# EAGLE board RH006.1 (EAGLE 7.1.0)
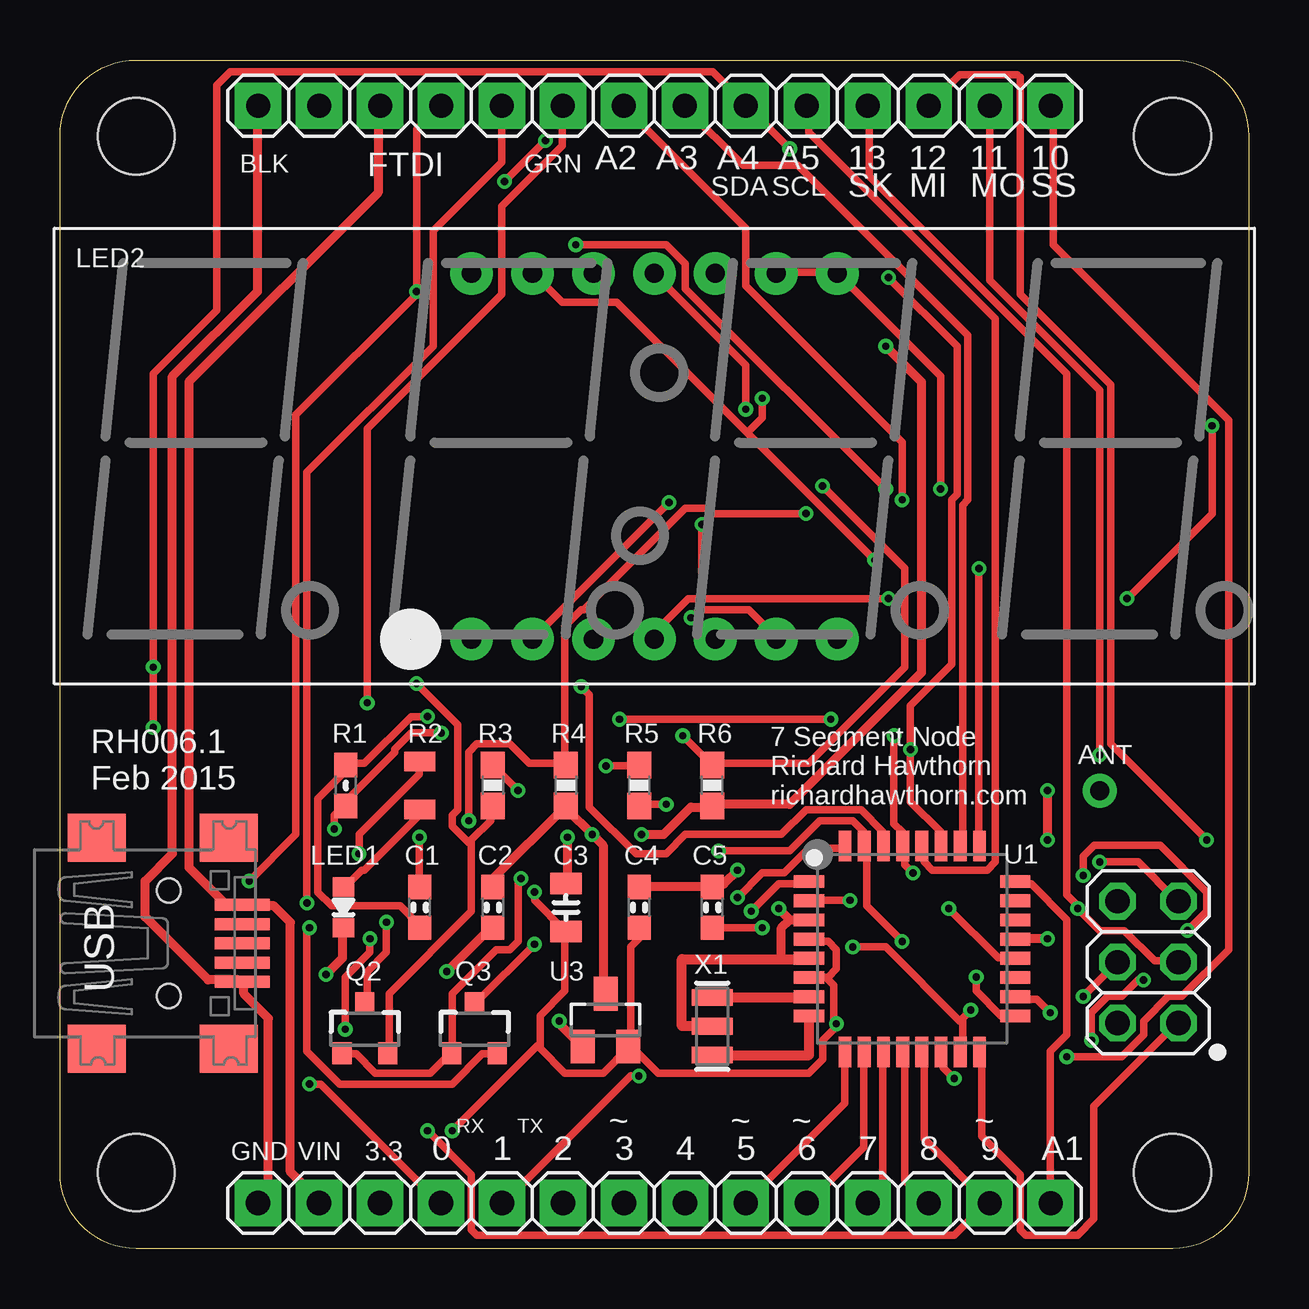
[diagram p0: board, top side]
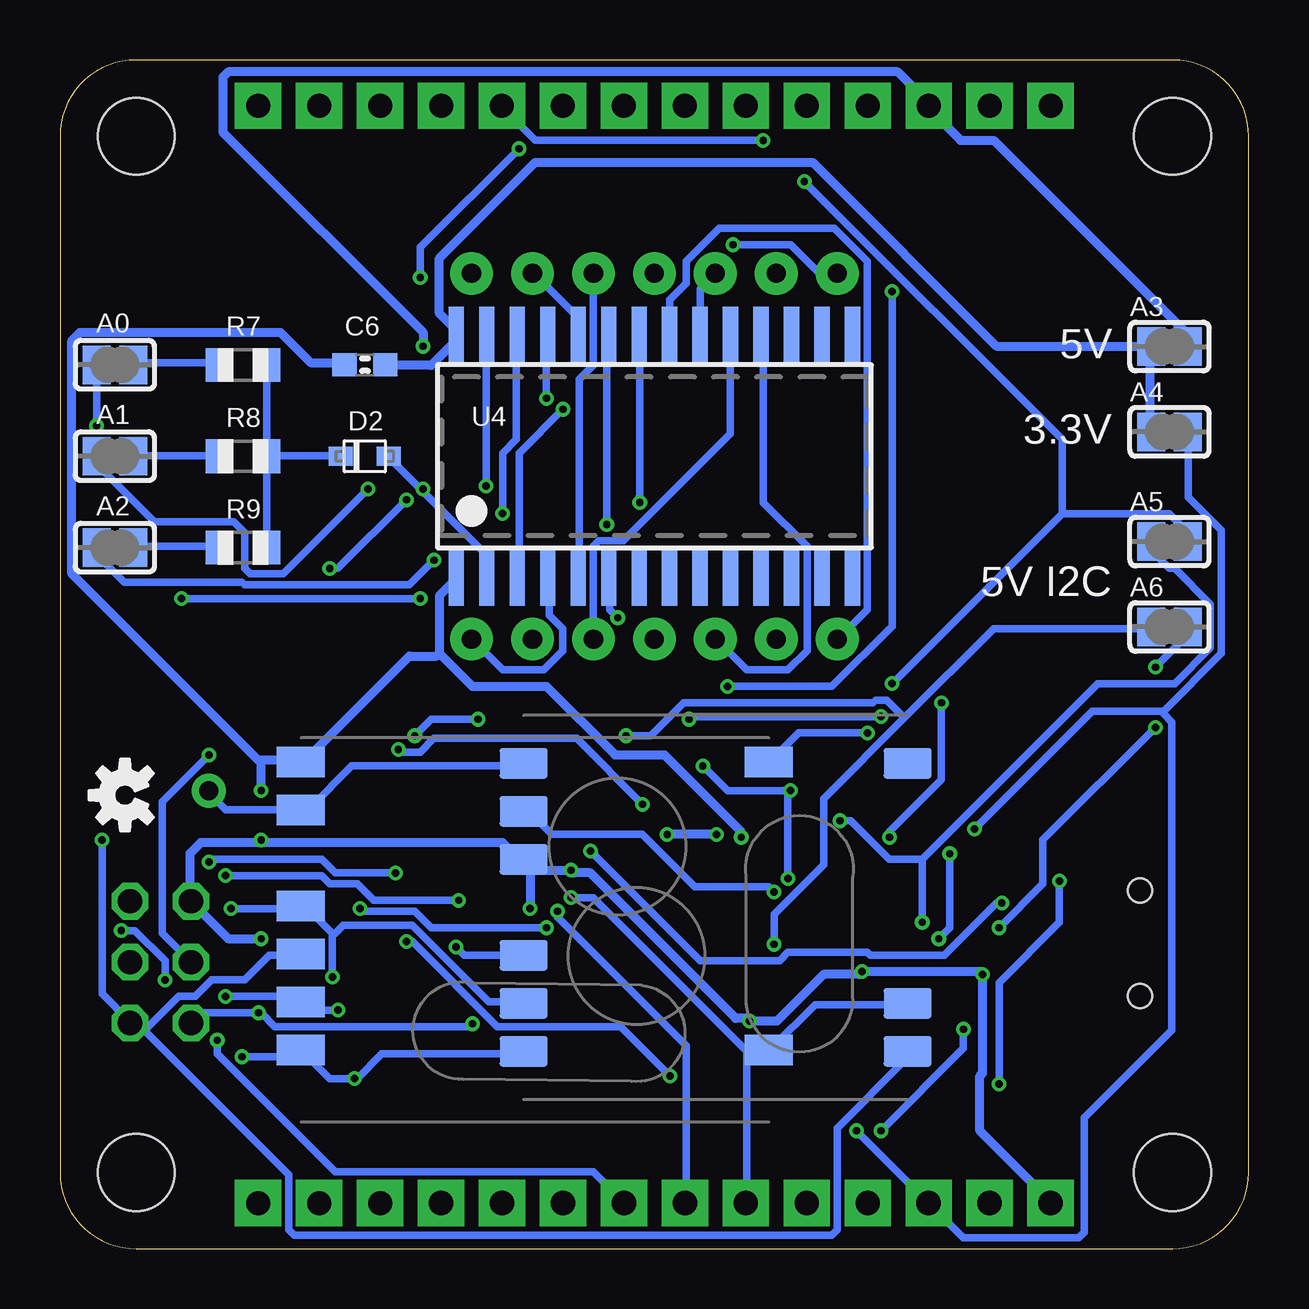
[diagram p1: board, bottom side, seen from below]

Size 49.53 x 49.53 mm. Coordinates in mm from the lower left corner, seen from the top.
Outline: 0,3.17 0,46.35 arc-90 3.17,49.53 46.35,49.53 arc-90 49.53,46.35 49.53,3.17 arc-90 46.35,0 3.17,0 arc-90 0,3.17
Copper layers (1*16): Top 0.035mm / dielectric 1.5mm / Bottom 0.035mm
Design rules "ITEADstudio_DRC *": minimum track width 12mil, minimum drill 12mil, track to track 6mil, track to pad 6mil, pad to pad 6mil, via to via 6mil, smd to smd 0mil, copper to edge 10mil, drill to drill 10mil, minimum pad ring 10mil, minimum via ring 6mil, stop-mask expansion 2mil, vias tented up to drill 100mil, thermal gap 15mil
Net classes: 1 power: width 0.381 mm, clearance 0.254 mm
Holes 3.2 mm at 3.17,3.17 46.35,3.17 3.17,46.35 46.35,46.35
tKeepout: area 0,0 to 5.7,5.7; area 43.8,0 to 49.5,5.7; area 43.8,43.8 to 49.5,49.5; area 0,43.8 to 5.7,49.5
bKeepout: area 0,43.8 to 5.7,49.5; area 43.8,43.8 to 49.5,49.5; area 43.8,0 to 49.5,5.7; area 0,0 to 5.7,5.7
tRestrict: area 24.3,8.9 to 29.1,12.8; area 5.8,16.9 to 6.9,18.5; area 5.2,9.7 to 6.7,10.4
bRestrict: area 27.4,17.7 to 29.2,18.7; area 21.1,13.8 to 22.9,14.9; area 21.6,12.6 to 22.1,13.2; area 20.7,12.6 to 21.2,13.2; area 20.2,12.8 to 20.7,13.5; area 20.1,13.4 to 20.6,14; area 26.5,18.9 to 27.1,19.5; area 26.5,17.9 to 27.1,18.5; area 27.5,19.1 to 28,19.8; area 27.9,18.8 to 29.1,19.6

## Footprints (pad centres in the part's own frame; a part is rotated, then mirrored left to right if it is on the bottom)
SOLDERJUMPER_REFLOW_NOPASTE = smd 1.168 x 1.6: 1 -0.762,0; 2 0.762,0
0603-CAP = smd 1.016 x 0.965: 1 -0.85,0; 2 0.85,0
0805-CAP = smd 0.902 x 1.3: 1 -1,0; 2 1,0
USB-MINIB = smd 0.5 x 2.308: D+ 0,4.064; D- -0.8,4.064; GND 1.6,4.064; ID 0.8,4.064; VBUS -1.6,4.064 | smd 2 x 2.4: GND1 -4.4,-2; GND2 -4.4,3.5; GND3 4.4,3.5; GND4 4.4,-2 | hole 1: -2.2,1; 2.2,1
1X06 = drill 1 pad 1.93 square: 1 -6.35,0; 2 -3.81,0; 3 -1.27,0; 4 1.27,0; 5 3.81,0; 6 6.35,0
SOD-323F = smd 1 x 0.8: A -1,0; C 1,0
2X03 = drill 1.016 octagon: 1 -2.54,-1.27; 2 -2.54,1.27; 3 0,-1.27; 4 0,1.27; 5 2.54,-1.27; 6 2.54,1.27
1X14 = drill 1 pad 1.93 square: 1 -16.51,0; 2 -13.97,0; 3 -11.43,0 | drill 1.016 pad 1.93 square: 4 -8.89,0; 5 -6.35,0; 6 -3.81,0; 7 -1.27,0; 8 1.27,0; 9 3.81,0; 10 6.35,0; 11 8.89,0; 12 11.43,0; 13 13.97,0; 14 16.51,0
1X08 = drill 1 pad 1.93 square: 1 -8.89,0; 2 -6.35,0; 3 -3.81,0; 4 -1.27,0; 5 1.27,0; 6 3.81,0; 7 6.35,0; 8 8.89,0
0603-LED = smd 0.8 x 0.9: MINUS -0.85,0; PLUS 0.85,0
SEGMENT-BL-Q56C43 = drill 0.8 pad 1.778: P$1 -7.62,-7.62; P$2 -5.08,-7.62; P$3 -2.54,-7.62; P$4 0,-7.62; P$5 2.54,-7.62; P$6 5.08,-7.62; P$7 7.62,-7.62; P$8 7.62,7.62; P$9 5.08,7.62; P$10 2.54,7.62; P$11 0,7.62; P$12 -2.54,7.62; P$13 -5.08,7.62; P$14 -7.62,7.62
SOT23-3 = smd 0.8 x 0.9: 1 -0.95,-1; 2 0.95,-1; 3 0,1.1
0603-RES = smd 1.016 x 0.965: 1 -0.85,0; 2 0.85,0
0805 = smd 0.8 x 1.3: 1 -1,0; 2 1,0
0603-RES' = smd 1.1 x 1: 1 -0.85,0; 2 0.85,0
R0805 = smd 1.1 x 1.4: 1 -1,0; 2 1,0
RFM12B-MINPADS = smd 2 x 1.27: ANT 8,-6; GND 8,-2; IRQ -8,4; SCK 8,4; SDI 8,2; SDI1 -8.002,-6.001; SDO -8,6; SEL 8,6; VDD 8,-4
RFM69W-MINPADS = smd 2 x 1.27: ANA 8,-5; DIO0 -11.5,5; GND 8,-7; MISO 8,1; MOSI 8,3; NSS 8,5; SCK 8,-1; VDD -11.5,-7
TQFP32-08 = smd 1.27 x 0.533: 1 -4.293,2.8; 2 -4.293,2; 3 -4.293,1.2; 4 -4.293,0.4; 5 -4.293,-0.4; 6 -4.293,-1.2; 7 -4.293,-2; 8 -4.293,-2.8; 17 4.293,-2.8; 18 4.293,-2; 19 4.293,-1.2; 20 4.293,-0.4; 21 4.293,0.4; 22 4.293,1.2; 23 4.293,2; 24 4.293,2.8 | smd 0.533 x 1.27: 9 -2.8,-4.293; 10 -2,-4.293; 11 -1.2,-4.293; 12 -0.4,-4.293; 13 0.4,-4.293; 14 1.2,-4.293; 15 2,-4.293; 16 2.8,-4.293; 25 2.8,4.293; 26 2,4.293; 27 1.2,4.293; 28 0.4,4.293; 29 -0.4,4.293; 30 -1.2,4.293; 31 -2,4.293; 32 -2.8,4.293
SOT23 = smd 1 x 1.4: 1 -0.95,-1.1; 2 0.95,-1.1; 3 0,1.1
SOP28_300MIL = smd 0.635 x 2.286: P$1 -8.255,-5.08; P$2 -6.985,-5.08; P$3 -5.715,-5.08; P$4 -4.445,-5.08; P$5 -3.175,-5.08; P$6 -1.905,-5.08; P$7 -0.635,-5.08; P$8 0.635,-5.08; P$9 1.905,-5.08; P$10 3.175,-5.08; P$11 4.445,-5.08; P$12 5.715,-5.08; P$13 6.985,-5.08; P$14 8.255,-5.08; P$15 8.255,5.08; P$16 6.985,5.08; P$17 5.715,5.08; P$18 4.445,5.08; P$19 3.175,5.08; P$20 1.905,5.08; P$21 0.635,5.08; P$22 -0.635,5.08; P$23 -1.905,5.08; P$24 -3.175,5.08; P$25 -4.445,5.08; P$26 -5.715,5.08; P$27 -6.985,5.08; P$28 -8.255,5.08
RFM12B-ANTENNA = drill 0.8 pad 1.422: P$1 0,0
RESONATOR-SMD = smd 0.7 x 1.7: 1 -1.2,0; 2 0,0; 3 1.2,0

## Placement (x,y rotation side)
A0  [SOLDERJUMPER_REFLOW_NOPASTE]  47.24,36.83 180 bottom
A1  [SOLDERJUMPER_REFLOW_NOPASTE]  47.24,33.02 180 bottom
A2  [SOLDERJUMPER_REFLOW_NOPASTE]  47.24,29.21 180 bottom
A3  5V  [SOLDERJUMPER_REFLOW_NOPASTE]  3.3,37.59 0 bottom
A4  3.3V  [SOLDERJUMPER_REFLOW_NOPASTE]  3.3,34.04 0 bottom
A5  SCL  [SOLDERJUMPER_REFLOW_NOPASTE]  3.3,29.46 0 bottom
A6  SDA  [SOLDERJUMPER_REFLOW_NOPASTE]  3.3,25.91 0 bottom
C1  0.1  [0603-CAP]  14.99,14.22 90 top
C2  1u  [0603-CAP]  18.03,14.22 270 top
C3  10u  [0805-CAP]  21.08,14.22 90 top
C4  0.1  [0603-CAP]  24.13,14.22 90 top
C5  0.1  [0603-CAP]  27.18,14.22 90 top
C6  0.1  [0603-CAP]  36.83,36.83 180 bottom
CN1  USB  [USB-MINIB]  3.53,12.73 270 top
CN4  FTDI  [1X06]  14.61,47.62 0 top
D2  1N4148  [SOD-323F]  36.83,33.02 180 bottom
ICSP1  ICSP  [2X03]  45.34,11.94 90 top
JP3  [1X14]  24.77,1.91 180 top
JP5  [1X08]  32.38,47.62 0 top
LED1  LED0603  [0603-LED]  11.81,14.22 90 top
LED2  [SEGMENT-BL-Q56C43]  24.77,33.02 0 top
Q2  BSS138  [SOT23-3]  12.7,9.14 0 top
Q3  BSS138  [SOT23-3]  17.27,9.14 0 top
R1  10k  [0603-RES]  11.91,19.3 90 top
R2  1k5  [0805]  14.99,19.3 90 top
R3  10K  [0603-RES']  18.03,19.3 270 top
R4  10K  [0603-RES']  21.08,19.3 90 top
R5  10K  [0603-RES']  24.13,19.3 270 top
R6  10K  [0603-RES']  27.18,19.3 90 top
R7  47K  [R0805]  41.91,36.83 180 bottom
R8  47K  [R0805]  41.91,33.02 180 bottom
R9  47K  [R0805]  41.91,29.21 180 bottom
RF1  RFM12B  [RFM12B-MINPADS]  22.21,14.22 180 bottom
RF2  RFM69  [RFM69W-MINPADS]  31.5,13.28 180 bottom
U1  ATMega-328  [TQFP32-08]  35.51,12.5 0 top
U3  MCP1703CB  [SOT23]  22.73,9.53 0 top
U4  [SOP28_300MIL]  24.77,33.02 0 bottom
U$1  RFM12B_ANTENNA  [RFM12B-ANTENNA]  43.33,19.08 0 top
U$3  [OSHW-LOGO-S]  46.82,18.9 90 bottom
X1  16 MHz  [RESONATOR-SMD]  27.18,9.27 270 top

## Library data of the parts
A0 A1-A6 LED2 U4 = microbuilder
C1-C6 CN1 LED1 R1 R2 RF1 RF2 U1 U$1 = LowPowerLab
CN4 ICSP1 JP3 JP5 = pinhead
D2 R7-R9 = adafruit
Q2 Q3 R3-R6 X1 = SparkFun
U3 = linear
U$3 = SparkFun-Aesthetics

## Nets
3.3V: A4.2 C3.1 C4.1 ICSP1.2 JP3.12 R1.1 RF1.VDD RF2.VDD U1.4 U1.6 U1.18 U3.2
A0: U1.23
A1: JP3.1 U1.24
A2: JP5.1 U1.25
A3: JP5.2 U1.26
A4_SDA: A6.2 JP5.3 Q3.2 R5.2 U1.27
A5_SCL: A5.2 JP5.4 Q2.2 R3.2 U1.28
A6: U1.19
A7: U1.22
ADD0: A0.2 LED2.P$4 U4.P$23
ADD1: A1.2 LED2.P$8 LED2.P$9 U4.P$24
ADD2: A2.2 LED2.P$13 U4.P$25
AREF: C5.1 U1.20
COM: D2.A LED2.P$14 U4.P$2
D0_RX: CN4.4 JP3.11 U1.30
D1_TX: CN4.5 JP3.10 U1.31
D2: JP3.9 RF1.IRQ RF2.DIO0 U1.32
D3: JP3.8 U1.1
D4: JP3.7 U1.2
D5: JP3.6 U1.9
D6: JP3.5 U1.10
D7: JP3.4 U1.11
D8: JP3.3 U1.12
D9: JP3.2 R2.2 U1.13
D10_SS: JP5.8 RF1.SEL RF2.NSS U1.14
D11_MOSI: ICSP1.4 JP5.7 RF1.SDI RF2.MOSI U1.15
D12_MISO: ICSP1.1 JP5.6 RF1.SDO RF2.MISO U1.16
D13_SCK: ICSP1.3 JP5.5 RF1.SCK RF2.SCK U1.17
GND [power]: C2.2 C3.2 C4.2 C5.2 C6.2 CN1.GND CN4.1 ICSP1.6 JP3.14 LED1.MINUS RF1.GND RF2.GND U1.3 U1.5 U1.21 U3.1 U4.P$1 X1.2
N$1: U1.7 X1.1
N$2: LED1.PLUS R2.1
N$3: RF1.ANT RF2.ANA U$1.P$1
N$5: A0.1 R7.2
N$7: LED2.P$11 U4.P$3
N$8: LED2.P$7 U4.P$4
N$9: LED2.P$10 U4.P$5
N$10: LED2.P$6 U4.P$6
N$11: LED2.P$2 U4.P$22
N$12: LED2.P$1 U4.P$21
N$13: LED2.P$12 U4.P$20
N$15: LED2.P$5 U4.P$19
N$16: LED2.P$3 U4.P$18
N$17: D2.C R7.1 R8.1 R9.1
N$18: A2.1 R9.2
N$19: A1.1 R8.2
N$20: C1.2 CN4.6
N$21: U1.8 X1.3
RST: C1.1 ICSP1.5 R1.2 U1.29
SCL: A5.1 Q2.3 R4.2 U4.P$26
SDA: A6.1 Q3.3 R6.2 U4.P$27
VBUS [power]: A3.2 C2.1 CN1.VBUS CN4.3 JP3.13 R4.1 R6.1 U3.3
VCC: Q2.1 Q3.1 R3.1 R5.1
VLED [power]: A3.1 A4.1 C6.1 U4.P$28

## Tracks (layer width: path | path; a pad name or v marks a point on that pad's centre or on a via)
3.3V  (via drill 0.3)
  Top 0.305: v15.89,21.49 14.63,21.49 13.95,20.8 13.95,20.69 12,18.75 12,18.52 R1.1 11.77,18.4 11.43,18.06 v11.43,17.49 | v41.26,9.83 40.69,10.4 39.89,10.4 U1.18 | 32,11.32 31.32,11.32 U1.6 | 32,11.32 32.35,11.66 32.35,12.46 32,12.8 31.32,12.8 U1.4 | C4.1 24.12,13.37 24.12,12.92 23.77,12.57 23.77,8.46 U3.2 | 20,8.46 20,8.34 21.03,7.32 22.63,7.32 23.66,8.34 U3.2 | 20,8.46 20,9.72 21.03,10.74 21.03,13.14 C3.1 21.03,13.26 19.77,14.52 v19.77,14.86 | 32.23,9.37 32.23,9.14 31.77,8.69 31.77,7.89 31.2,7.32 24.92,7.32 23.89,8.34 U3.2 | 32.23,9.37 32.23,10.97 32,11.2 32,11.32 | v16.34,4.92 19.89,8.46 20,8.46 | v32.35,9.37 32.23,9.37
  Bottom 0.305: v15.89,21.49 18.75,21.49 19.89,20.34 RF2.VDD 20,20.34 | 3.54,22.4 1.14,24.8 1.14,29.95 2.52,31.32 2.52,33.95 A4.2 | 3.54,22.4 6.51,22.4 v11.43,17.49 | ICSP1.2 44.01,9.49 43.66,9.83 v41.26,9.83 41.15,9.83 40.58,9.26 32.46,9.26 v32.35,9.37 | v19.77,14.86 20,15.09 23.09,15.09 25.26,17.26 29.03,17.26 29.95,18.17 30.18,18.17 RF1.VDD | v16.34,4.92 JP3.12 11.89,0.46 7.09,0.46 6.86,0.69 6.86,5.45 3.2,9.11 3.2,21.95 3.54,22.29 3.54,22.4
A1
  Top 0.305: U1.24 39.89,15.2 40.46,15.2 41.95,13.72 41.95,8.91 41.26,8.23 41.26,1.94 JP3.1
A2  (via drill 0.3)
  Top 0.305: v38.29,28.35 38.29,16.8 U1.25 | v35.09,31.2 35.09,33.6 28.57,40.12 28.57,42.52 23.55,47.55 JP5.1
  Bottom 0.305: v38.29,28.35 37.95,28.35 v35.09,31.2
A3
  Top 0.305: U1.26 37.6,16.8 37.6,30.98 37.83,31.2 37.83,38.06 30.75,45.15 28.46,45.15 26.06,47.55 JP5.2
A4_SDA  (via drill 0.3)
  Top 0.305: v25.26,18.52 24.23,18.52 R5.2 | U1.27 36.69,16.8 36.69,17.37 35.43,18.63 v35.43,20.8 35.43,22.63 37.15,24.35 37.15,31.2 37.38,31.43 37.38,37.6 v34.52,40.46 | v10.4,13.37 10.29,13.26 10.29,8.23 11.66,6.86 16.34,6.86 17.6,8.12 18.17,8.12 Q3.2 | v3.89,21.72 v3.89,24.23 3.89,36.46 6.53,39.1 6.53,48.48 7.09,49.03 27.2,49.03 28.57,47.66 JP5.3 28.69,47.55 v30.4,45.83
  Bottom 0.305: v25.26,18.52 28,21.26 33.95,21.26 34.52,20.69 35.32,20.69 v35.43,20.8 | v10.4,13.37 8.57,15.2 8.57,17.03 v3.89,21.72 | v3.89,24.23 2.63,25.49 2.63,25.83 A6.2 | v34.52,40.46 34.52,41.72 v30.4,45.83
A5_SCL  (via drill 0.3)
  Top 0.305: 17.14,16.92 17.14,17.03 17.95,17.83 17.95,18.4 R3.2 | 17.14,16.92 17.14,14.06 13.72,10.63 13.72,8.23 Q2.2 | v14.86,23.55 16.57,21.83 16.57,18.29 16.34,18.06 16.34,17.6 17.03,16.92 17.14,16.92 | U1.28 36.01,16.69 36.01,16.12 36.35,15.77 38.63,15.77 38.98,16.12 38.98,38.75 31.2,46.52 31.2,47.55 JP5.4 | v20.23,46.18 v18.52,44.46
  Bottom 0.305: 7.77,30.63 3.31,30.63 2.63,29.95 2.63,29.49 A5.2 | v14.86,23.55 7.77,30.63 | 7.77,30.63 7.77,33.72 v18.52,44.46 | v20.23,46.18 29.72,46.18 31.09,47.55 JP5.4
ADD0  (via drill 0.3)
  Top 0.305: v48.01,34.29 48.01,30.63 v44.46,27.09 | 26.75,27.09 26.18,27.09 24.8,25.72 24.8,25.49 LED2.P$4 | 26.75,27.09 v34.52,27.09 | 26.75,27.09 v26.75,30.18
  Bottom 0.305: v48.01,34.29 A0.2 | v34.52,27.09 v44.46,27.09 | v26.75,30.18 26.75,38.06 U4.P$23
ADD1  (via drill 0.3)
  Top 0.305: v36.69,31.66 36.69,36.35 32.46,40.58 LED2.P$8 32.23,40.69 29.95,40.69 LED2.P$9
  Bottom 0.305: U4.P$24 28,38.18 28,38.86 29.83,40.69 LED2.P$9 | A1.2 48.01,32.69 45.61,30.29 42.29,30.29 41.83,29.83 41.83,28.35 41.6,28.12 40.23,28.12 v36.69,31.66
ADD2  (via drill 0.3)
  Top 0.305: 28.63,34 23.2,39.43 20.92,39.43 19.77,40.58 LED2.P$13 | 28.63,34 v33.95,28.69 | v29.26,35.43 29.26,34.63 28.63,34
  Bottom 0.305: A2.2 48.01,28.92 46.86,27.77 41.95,27.77 41.83,27.66 34.98,27.66 v33.95,28.69 | v29.26,35.43 29.26,38.06 U4.P$25
AREF  (via drill 0.3)
  Top 0.305: v29.26,13.37 27.2,13.37 C5.1 | v37.03,14.17 39.09,12.12 39.78,12.12 U1.20
  Bottom 0.305: v29.26,13.37 34.06,13.37 34.75,14.06 36.92,14.06 v37.03,14.17
COM  (via drill 0.3)
  Top 0.305: v21.49,41.83 25.26,41.83 26.06,41.03 26.06,40.01 v34.4,31.66
  Bottom 0.305: 34.46,31.6 31.77,28.92 31.77,28 U4.P$2 | 34.46,31.6 35.78,32.92 D2.A | v21.49,41.83 19.09,41.83 17.95,40.69 17.14,40.69 LED2.P$14 | v34.4,31.66 34.46,31.6
D0_RX  (via drill 0.3)
  Top 0.305: v21.72,23.43 22.06,23.09 22.06,18.4 24,16.46 25.26,16.46 26.06,17.26 30.06,17.26 31.09,18.29 33.38,18.29 34.29,17.37 34.29,16.8 U1.30 | CN4.4 15.77,47.55 14.86,46.63 v14.86,39.89 14.86,39.78 9.83,34.75 9.83,17.26 v7.89,15.32 | v10.4,6.86 10.86,6.86 15.77,1.94 JP3.11
  Bottom 0.305: v21.72,23.43 17.37,23.43 14.86,25.95 v14.86,39.89 | v10.4,6.86 10.4,11.09 7.89,13.6 v7.89,15.32
D1_TX  (via drill 0.3)
  Top 0.305: v35.09,12.8 33.6,14.29 33.6,16.69 U1.31 33.49,16.92 33.49,17.37 33.03,17.83 31.66,17.83 30.4,16.57 v27.43,16.57 | v24.12,7.2 23.77,7.2 18.52,1.94 JP3.10 | v10.29,14.4 10.29,32.35 15.54,37.6 15.54,42.41 18.4,45.26 18.4,47.55 CN4.5
  Bottom 0.305: v35.09,12.8 34.86,12.8 31.32,9.26 26.18,9.26 v24.12,7.2 | v10.29,14.4 10.52,14.4 12.69,12.23 15.77,12.23 15.89,12.34 19.2,12.34 19.55,12 22.86,12 v27.43,16.57
D2  (via drill 0.3)
  Top 0.305: v28.23,14.63 29.26,15.66 30.18,15.66 31.2,16.69 32.69,16.69 U1.32
  Bottom 0.305: v28.23,14.63 27.32,14.63 21.03,8.34 20,8.34 RF2.DIO0 | RF1.IRQ 14.29,10.17 18.06,10.17 19.89,8.34 RF2.DIO0 | JP3.9 20.92,1.94 20.92,8.23 RF2.DIO0
D3  (via drill 0.3)
  Top 0.305: v28.8,14.06 29.95,15.2 31.2,15.2 U1.1
  Bottom 0.305: v28.8,14.06 28.8,13.83 23.43,8.46 23.43,1.94 JP3.8
D4  (via drill 0.3)
  Top 0.305: v32.92,14.52 31.32,14.52 U1.2 | v42.63,15.54 42.63,16.34 43.09,16.8 45.83,16.8 47.78,14.86 47.78,14.06 v46.98,13.26 | v45.15,11.2 44.92,11.2 44.23,10.52 43.66,10.52 42.98,9.83 v42.98,8.69
  Bottom 0.305: v32.92,14.52 36.46,14.52 37.15,15.2 38.29,15.2 38.63,15.54 v42.63,15.54 | v46.98,13.26 46.41,13.26 45.15,12 v45.15,11.2 | v42.98,8.69 42.98,8.12 38.06,3.2 27.32,3.2 26.06,1.94 JP3.7
D5
  Top 0.305: U1.9 32.69,8.12 32.69,6.06 28.57,1.94 JP3.6
D6
  Top 0.305: U1.10 33.49,8.12 33.49,4.23 31.2,1.94 JP3.5
D7
  Top 0.305: U1.11 34.29,8.12 34.29,2.52 33.72,1.94 JP3.4
D8
  Top 0.305: U1.12 35.2,8.12 35.2,2.86 36.12,1.94 JP3.3
D9  (via drill 0.3)
  Top 0.305: U1.13 36.01,8.12 36.01,4.57 38.63,1.94 JP3.2 38.52,1.83 37.26,0.57 17.37,0.57 17.14,0.8 17.14,3.09 v15.32,4.92 | v12.46,16.46 12.46,17.26 14.97,19.77 14.97,20.23 R2.2 | v12.92,12.92 12.92,12.34 11.89,11.32 v11.89,9.14
  Bottom 0.305: v12.46,16.46 12.46,13.37 v12.92,12.92 | v11.89,9.14 11.89,8.34 v15.32,4.92
D10_SS  (via drill 0.3)
  Top 0.305: v37.26,7.09 36.8,7.54 36.8,8.12 U1.14 | v41.95,8 44.23,8 45.15,8.91 45.15,9.49 46.18,10.52 46.75,10.52 48.69,12.46 48.69,34.52 41.38,41.83 41.38,47.55 JP5.8
  Bottom 0.305: RF1.SEL 30.29,8.12 36.12,8.12 37.15,7.09 v37.26,7.09 38.29,7.09 39.43,8.23 RF2.NSS 39.55,8.23 39.78,8 v41.95,8
D11_MOSI  (via drill 0.3)
  Top 0.305: 37.6,9.49 37.6,9.6 v37.95,9.94 | 37.6,9.49 37.6,8.23 U1.15 | v33.03,12.57 34.4,12.57 37.49,9.49 37.6,9.49 | v42.63,10.52 44.01,11.89 ICSP1.4 | v43.32,20.57 43.32,35.78 38.75,40.35 38.75,47.55 JP5.7
  Bottom 0.305: v37.95,9.94 39.2,9.94 39.43,10.17 RF2.MOSI 39.55,10.4 39.66,10.52 v42.63,10.52 | v33.03,12.57 32.69,12.23 30.29,12.23 RF1.SDI | v43.32,20.57 45.26,18.63 45.26,13.14 44.12,12 ICSP1.4
D12_MISO  (via drill 0.3)
  Top 0.305: U1.16 38.41,8.12 38.41,4.69 40.01,3.09 40.01,0.8 40.23,0.57 42.41,0.57 43.08,1.25 43.08,5.93 46.52,9.37 ICSP1.1 | JP5.6 37.49,48.92 39.89,48.92 40.01,48.81 40.01,39.78 43.78,36.01 43.78,21.03 v47.78,17.03
  Bottom 0.305: RF1.SDO 14.29,8.12 14.29,7.89 17.14,5.03 17.14,0.8 17.37,0.57 39.78,0.57 40.01,0.8 40.01,3.09 46.29,9.37 46.52,9.37 ICSP1.1 | RF2.MISO 39.55,12.23 40.8,12.23 41.83,11.2 43.2,11.2 43.89,10.52 44.58,10.52 45.95,9.14 ICSP1.1 | v47.78,17.03 47.78,10.63 46.63,9.49 ICSP1.1
D13_SCK  (via drill 0.3)
  Top 0.305: v38.18,11.32 38.18,10.74 39.2,9.72 39.78,9.72 U1.17 | ICSP1.3 46.52,12 45.61,12 44.35,13.26 43.32,13.26 v42.41,14.17 42.41,14.29 41.95,14.74 41.95,36.46 33.72,44.69 33.72,47.55 JP5.5
  Bottom 0.305: 38.18,13.14 v38.18,11.32 | 38.18,13.14 39.2,14.17 39.43,14.17 RF2.SCK 39.55,14.17 v42.41,14.17 | RF1.SCK 30.29,10.29 31.66,10.29 34.86,13.49 37.72,13.49 38.06,13.14 38.18,13.14
GND  (via drill 0.3)
  Top 0.381: v21.14,17.14 21.14,15.32 C3.2 | v41.15,12.92 39.89,12.92 U1.21 | C4.2 24.23,15.09 27.09,15.09 C5.2 27.32,15.2 27.66,15.2 v28.23,15.77 | 30.4,13.72 31.2,13.72 U1.3 | 30.4,13.72 30.06,13.37 30.06,12.06 | v29.95,14.17 30.4,13.72 | v11.09,11.43 11.77,12.12 11.77,13.37 LED1.MINUS | v16.12,11.54 17.95,13.37 C2.2 | v20.8,9.49 20.8,9.37 21.72,8.46 U3.1 | JP3.14 8.34,1.94 8.69,2.29 8.69,9.6 7.66,10.63 7.66,11.09 CN1.GND 7.43,11.2 6.17,11.2 3.54,13.83 3.54,15.32 4.69,16.46 4.69,36.35 8.23,39.89 8.23,47.55 CN4.1 | v41.15,17.03 v41.15,19.09
  Top 0.406: X1.2 25.91,9.27 25.91,12.06 30.06,12.06 31.22,12.06 U1.5
  Bottom 0.381: v21.14,17.14 21.14,17.37 24.35,20.57 26.4,20.57 29.26,23.43 32.35,23.43 33.72,24.8 | 33.72,24.8 33.72,27.2 33.03,27.89 U4.P$1 | 41.26,20.34 49.03,28.12 49.03,37.83 48.69,38.18 40.35,38.18 39.09,36.92 37.72,36.92 C6.2 | 41.26,20.34 39.55,20.34 RF2.GND 39.32,20.34 34.98,24.69 33.83,24.69 33.72,24.8 | v41.15,12.92 42.52,12.92 44.01,14.4 ICSP1.6 44.12,14.63 44.12,16.46 43.66,16.92 41.15,16.92 | v29.95,14.17 29.95,15.89 30.18,16.12 RF1.GND | RF1.GND 29.83,15.77 v28.23,15.77 28.12,15.66 27.43,15.66 21.37,9.6 20.92,9.6 v20.8,9.49 19.66,9.49 17.72,11.43 16.23,11.43 v16.12,11.54 11.2,11.54 v11.09,11.43 11.09,7.32 11.2,7.2 11.2,4.92 8.23,1.94 JP3.14 | 41.15,16.92 31.09,16.92 30.4,16.23 RF1.GND | v41.15,19.09 41.15,20.23 41.26,20.34 | v41.15,17.03 41.15,16.92
N$1
  Top 0.406: X1.1 31.22,10.47 U1.7
N$2
  Top 0.305: LED1.PLUS 11.89,15.09 12.57,15.77 12.69,15.77 14.97,18.06 14.97,18.29 R2.1
N$3
  Bottom 0.305: U$1.P$1 43.32,18.97 42.63,18.29 39.55,18.29 RF2.ANA 39.43,18.4 39.09,18.4 37.38,20.12 30.29,20.12 RF1.ANT
N$5
  Bottom 0.305: R7.2 42.98,36.92 46.41,36.92 A0.1
N$7  (via drill 0.3)
  Top 0.305: v28.57,34.98 28.57,36.8 24.8,40.58 LED2.P$11
  Bottom 0.305: v28.57,34.98 30.4,33.15 30.4,28 U4.P$3
N$8
  Bottom 0.305: U4.P$4 29.15,27.89 29.15,26.4 28.57,25.83 28.57,24.92 29.38,24.12 31.09,24.12 32.35,25.38 LED2.P$7
N$9
  Bottom 0.305: U4.P$5 27.89,28 27.89,36.23 27.32,36.8 27.32,40.58 LED2.P$10
N$10  (via drill 0.3)
  Top 0.305: v26.29,26.29 26.63,26.63 28.69,26.63 29.83,25.49 LED2.P$6
  Bottom 0.305: v26.29,26.29 26.63,26.63 26.63,27.89 U4.P$6
N$11  (via drill 0.3)
  Top 0.305: LED2.P$2 v25.38,31.09
  Bottom 0.305: v25.38,31.09 25.38,38.06 U4.P$22
N$12
  Bottom 0.305: U4.P$21 24.12,38.18 24.12,39.55 23.43,40.23 23.43,41.15 22.06,42.52 17.26,42.52 15.89,41.15 15.89,26.63 17.14,25.38 LED2.P$1
N$13
  Bottom 0.305: U4.P$20 22.86,40.01 LED2.P$12
N$15
  Bottom 0.305: U4.P$19 21.6,38.06 21.6,33.95 26.06,29.49 27.09,29.49 27.32,29.26 27.32,25.49 LED2.P$5
N$16
  Bottom 0.305: U4.P$18 20.23,38.06 20.23,31.09 18.4,29.26 18.4,24.92 19.2,24.12 20.92,24.12 22.17,25.38 LED2.P$3
N$17
  Bottom 0.305: D2.C 37.83,33.03 40.8,33.03 R8.1 | R9.1 40.92,29.26 40.92,32.92 R8.1 | R7.1 40.92,36.8 40.92,33.15 R8.1
N$18
  Bottom 0.305: R9.2 42.98,29.26 46.41,29.26 A2.1
N$19
  Bottom 0.305: R8.2 42.98,33.03 46.41,33.03 A1.1
N$20  (via drill 0.3)
  Top 0.305: v14.97,17.14 14.97,15.09 C1.2 | v12.8,22.75 12.8,34.18 18.4,39.78 18.4,43.43 20.92,45.95 20.92,47.55 CN4.6
  Bottom 0.305: v14.97,17.14 14.97,17.37 12.8,19.55 v12.8,22.75
N$21
  Top 0.406: X1.3 31.22,8.07 U1.8
RST  (via drill 0.3)
  Top 0.305: C1.1 14.97,13.49 14.17,14.29 11.32,14.29 10.74,14.86 10.74,18.75 11.89,19.89 11.89,20.12 R1.2 12,20.23 12.69,20.23 14.63,22.17 v15.32,22.17 | v35.55,15.66 35.2,16 35.2,16.69 U1.29 35.09,16.92 35.09,17.37 34.75,17.72 v34.75,21.37 | v43.32,16.12 44.92,16.12 46.52,14.52 ICSP1.5 | v32.12,22.06 v23.32,22.06
  Bottom 0.305: v35.55,15.66 38.06,15.66 38.63,16.23 43.2,16.23 v43.32,16.12 | v15.32,22.17 23.2,22.17 v23.32,22.06 | v32.12,22.06 34.06,22.06 v34.75,21.37
SCL  (via drill 0.3)
  Top 0.305: v13.6,13.6 13.6,12.34 12.8,11.54 12.8,10.29 Q2.3 | v17.03,17.83 17.03,20.69 17.37,21.03 18.75,21.03 19.55,20.23 21.03,20.23 R4.2 21.03,20.34 21.03,25.95 21.72,26.63 21.83,26.63 26.06,30.86 26.98,30.86 27.2,30.63 v31.09,30.63
  Bottom 0.305: 13.6,16.23 v13.6,13.6 | 13.6,16.23 6.29,23.55 3.09,23.55 1.6,25.03 1.6,26.86 3.09,28.35 3.31,28.35 4,29.03 4,29.38 A5.1 | v17.03,17.83 16.57,17.83 14.97,16.23 13.6,16.23 | v31.09,30.63 31.09,33.15 30.52,33.72 30.52,38.06 U4.P$26
SDA  (via drill 0.3)
  Top 0.305: v19.77,12.69 17.37,10.29 Q3.3 | v25.95,21.37 27.09,20.23 R6.2 27.32,20.23 31.2,20.23 35.2,24.23 35.2,28.35 v31.77,31.77
  Bottom 0.305: v19.77,12.69 19.77,13.95 17.72,16 17.72,18.75 14.35,22.12 | 14.35,22.12 10.63,25.83 4.12,25.83 A6.1 | v25.95,21.37 24.92,21.37 23.55,22.75 15.66,22.75 15.54,22.86 15.09,22.86 14.35,22.12 | v31.77,31.77 31.77,38.06 U4.P$27
VBUS  (via drill 0.3)
  Top 0.381: JP3.13 10.86,1.94 9.6,3.2 9.6,13.6 8.91,14.29 7.66,14.29 CN1.VBUS 7.43,14.4 6.86,14.4 5.37,15.89 5.37,36.12 13.26,44.01 13.26,47.55 CN4.3 | C2.1 18.06,15.09 18.06,15.43 21.03,18.4 R4.1 21.14,18.29 v22.17,17.26 22.63,16.8 22.63,10.63 U3.3 | v24.23,17.26 25.15,17.26 26.29,18.4 27.09,18.4 R6.1 27.32,18.52 30.4,18.52 35.89,24 35.89,36.12 v34.4,37.6
  Bottom 0.381: v22.17,17.26 v24.23,17.26 | A3.2 2.63,37.6 2.63,38.18 10.63,46.18 12,46.18 13.37,47.55 CN4.3 13.37,47.78 14.63,49.03 42.52,49.03 42.75,48.81 42.75,46.52 34.4,38.18 v34.4,37.6
VCC  (via drill 0.3)
  Top 0.305: Q2.1 11.77,8.12 12.34,8.12 13.14,7.32 15.43,7.32 16.23,8.12 Q3.1 16.34,8.23 16.34,10.63 18.17,12.46 18.75,12.46 19.09,12.8 19.09,15.32 v19.2,15.43 | v19.09,19.09 18.06,20.12 R3.1 | v22.75,20.12 24.12,20.12 R5.1
  Bottom 0.305: v22.75,20.12 21.72,19.09 v19.09,19.09 19.2,18.97 v19.2,15.43
VLED
  Bottom 0.381: A4.1 4.12,34.06 4.12,37.49 A3.1 4.23,37.6 10.52,37.6 18.17,45.26 29.72,45.26 33.72,41.26 33.72,38.98 33.03,38.29 U4.P$28 33.03,38.06 33.03,37.83 34.06,36.8 35.89,36.8 C6.1

## Text on the board
tNames: FTDI | BLK | GRN | A2 | A3 | A4 | A5 | 13 | 12 | 11 | 10 | SDA | SCL | SK | MI | MO | SS | ANT | RH006.1 / Feb 2015 | 7 Segment Node / Richard Hawthorn / richardhawthorn.com | RX | TX | ~ | ~ | ~ | ~ | GND | VIN | 3.3 | 0 | 1 | 2 | 3 | 4 | 5 | 6 | 7 | 8 | 9 | A1
bNames: 5V | 3.3V | 5V I2C
tDocu: REG